# EAGLE board pcb_balun_bottom_notch (EAGLE 9.6.2)
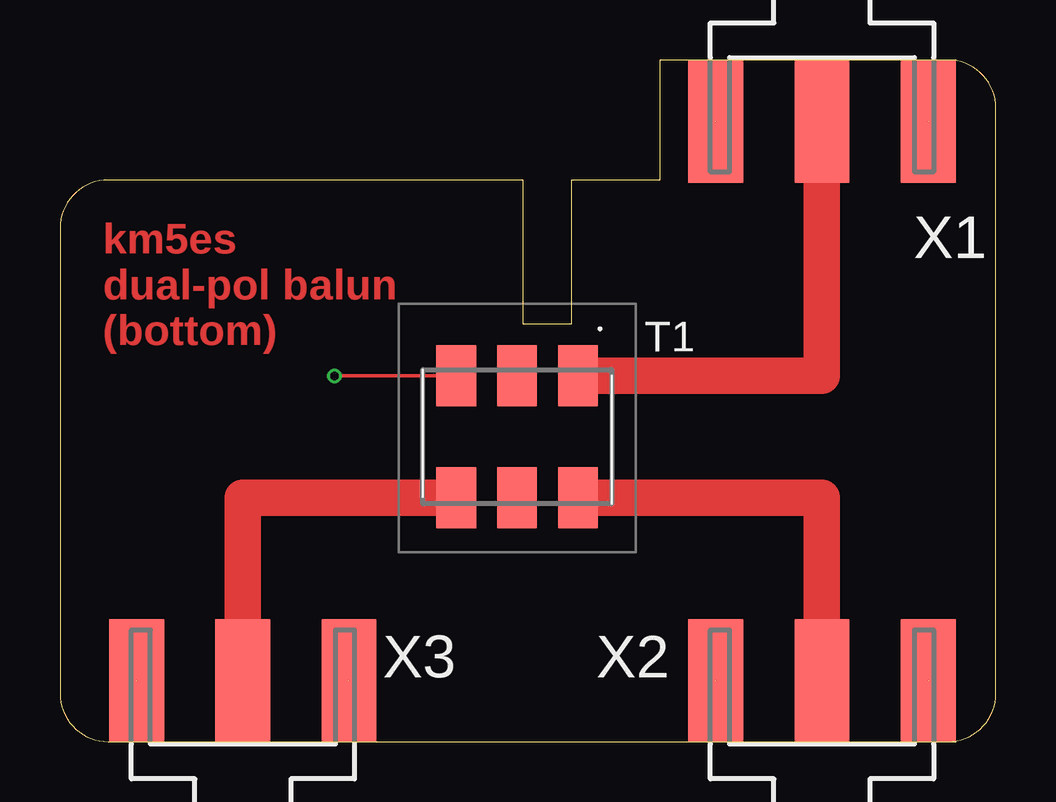
[diagram p0: board, top side]
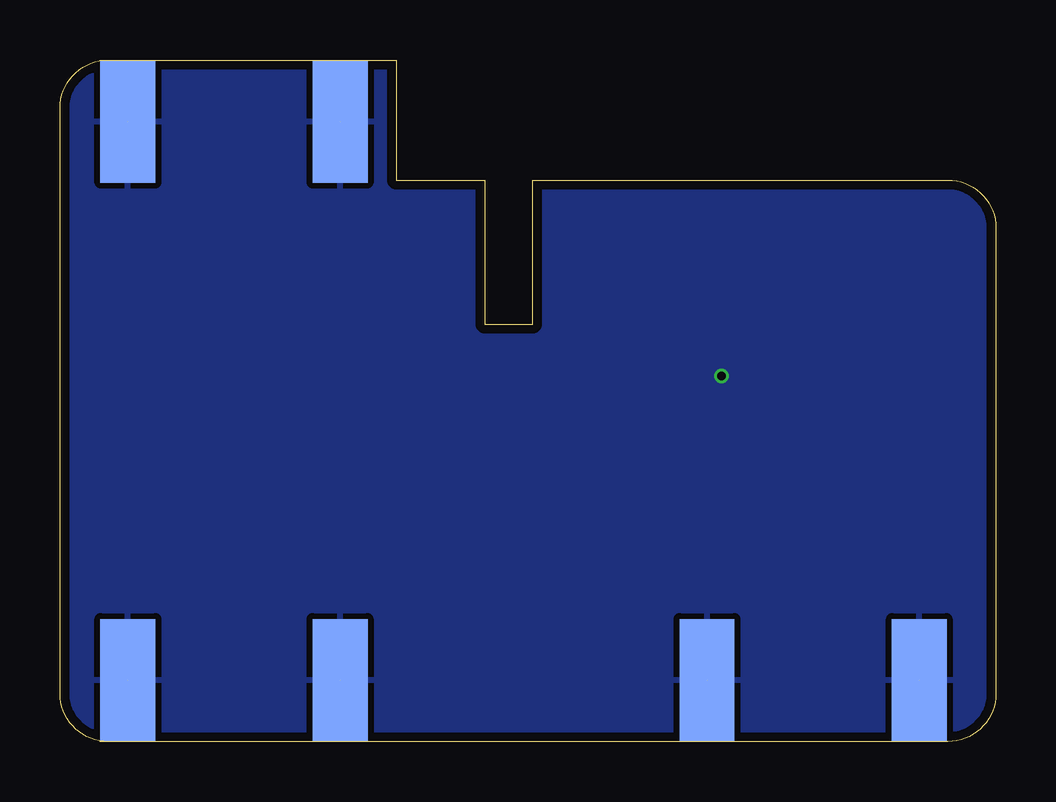
[diagram p1: board, bottom side, seen from below]

Size 39 x 28.4 mm. Coordinates in mm from the lower left corner, seen from the top.
Outline: 0,2 arc90 2,0 37,0 arc90 39,2 39,26.4 arc90 37,28.4 25,28.4 25,23.4 21.3,23.4 21.3,17.4 19.3,17.4 19.3,23.4 2,23.4 arc90 0,21.4 0,2
Copper layers (1*16): Top 0.035559375mm / dielectric 1.6mm / Bottom 0.035559375mm
Design rules "oshpark-2layer": minimum track width 6mil, minimum drill 10mil, track to track 6mil, track to pad 6mil, pad to pad 6mil, via to via 6mil, smd to smd 6mil, copper to edge 15mil, drill to drill 6mil, minimum pad ring 5mil, minimum via ring 5mil, stop-mask expansion 2.5mil, vias tented up to drill 0mil, thermal gap 10mil

## Footprints (pad centres in the part's own frame; a part is rotated, then mirrored left to right if it is on the bottom)
ADT11WT = smd 1.65 x 2.54: 1 -2.54,-2.54; 2 0,-2.54; 3 2.54,-2.54; 4 2.54,2.54; 5 0,2.54; 6 -2.54,2.54
J502-ND-142-0701-801/806 = smd 5.08 x 2.286: 1 2.565,0; G@1 2.565,4.42; G@2 2.565,-4.42 | smd 5.08 x 2.286 bottom: G@3 2.565,4.42; G@4 2.565,-4.42

## Placement (x,y rotation side)
T1  ADT1-1WT+  [ADT11WT]  19.05,12.7 180 top
X1  SMA-142-0701-801/806  [J502-ND-142-0701-801/806]  31.75,28.4 270 top
X2  SMA-142-0701-801/806  [J502-ND-142-0701-801/806]  31.75,0 90 top
X3  SMA-142-0701-801/806  [J502-ND-142-0701-801/806]  7.62,0 90 top

## Library data of the parts
T1 = ADT1-1WT+; ARROW_PART_NUMBER: ADT1-1WT+; DESCRIPTION: RF Transformer; HEIGHT: 2.84mm; MANUFACTURER_NAME: Mini-Circuits; MANUFACTURER_PART_NUMBER: ADT1-1WT+; MOUSER_PART_NUMBER: 139-ADT1-1WT; MOUSER_PRICE-STOCK: https://www.mouser.co.uk/ProductDetail/Mini-Circuits/ADT1-1WT%2b?qs=xZ%2FP%252Ba9zWqYbLxnb6qhNYw%3D%3D
X1 = con-coax_flange_mount_edit; MF: JOHNSON COMPONENTS; MPN: 142-0701-801; OC_FARNELL: 1608592; OC_NEWARK: 90F2624
X2 X3 = con-coax; MF: JOHNSON COMPONENTS; MPN: 142-0701-801; OC_FARNELL: 1608592; OC_NEWARK: 90F2624

## Nets
GND: T1.3 X1.G@1 X1.G@2 X1.G@3 X1.G@4 X2.G@1 X2.G@2 X2.G@3 X2.G@4 X3.G@1 X3.G@2 X3.G@3 X3.G@4
N$1: T1.1 X1.1
N$2: T1.6 X2.1
N$3: T1.4 X3.1

## Tracks (layer width: path | path; a pad name or v marks a point on that pad's centre or on a via)
GND  (via drill 0.35)  (6 unrouted)
  Top 0.152: T1.3 v11.43,15.24
  pour Bottom: 0,0 39.37,0 39.37,30.48 24.13,30.48 24.13,25.4 0,25.4
  pour Bottom: 0,0 39.37,0 39.37,30.48 25.4,30.48 25.4,25.4 20.32,25.4 20.32,19.05 19.05,19.05 19.05,24.13 19.05,25.4 0,25.4
N$1
  Top 1.524: T1.1 31.75,15.24 X1.1
N$2
  Top 1.524: T1.6 31.75,10.16 X2.1
N$3
  Top 1.524: T1.4 7.62,10.16 X3.1

## Text on the board
Top: km5es / dual-pol balun / (bottom)